# Altium PCB AUPSC.PcbDoc
Units mil, origin at the board's own origin, x right, y up, seen from the top; angles counter-clockwise.
Board outline 1204 x 1064 mil, 4 copper layers (Top Layer, GND, Layer 2, Bottom Layer), stack 63.159 mil thick; 38 components, 23 nets, 118 pads, 156 vias.
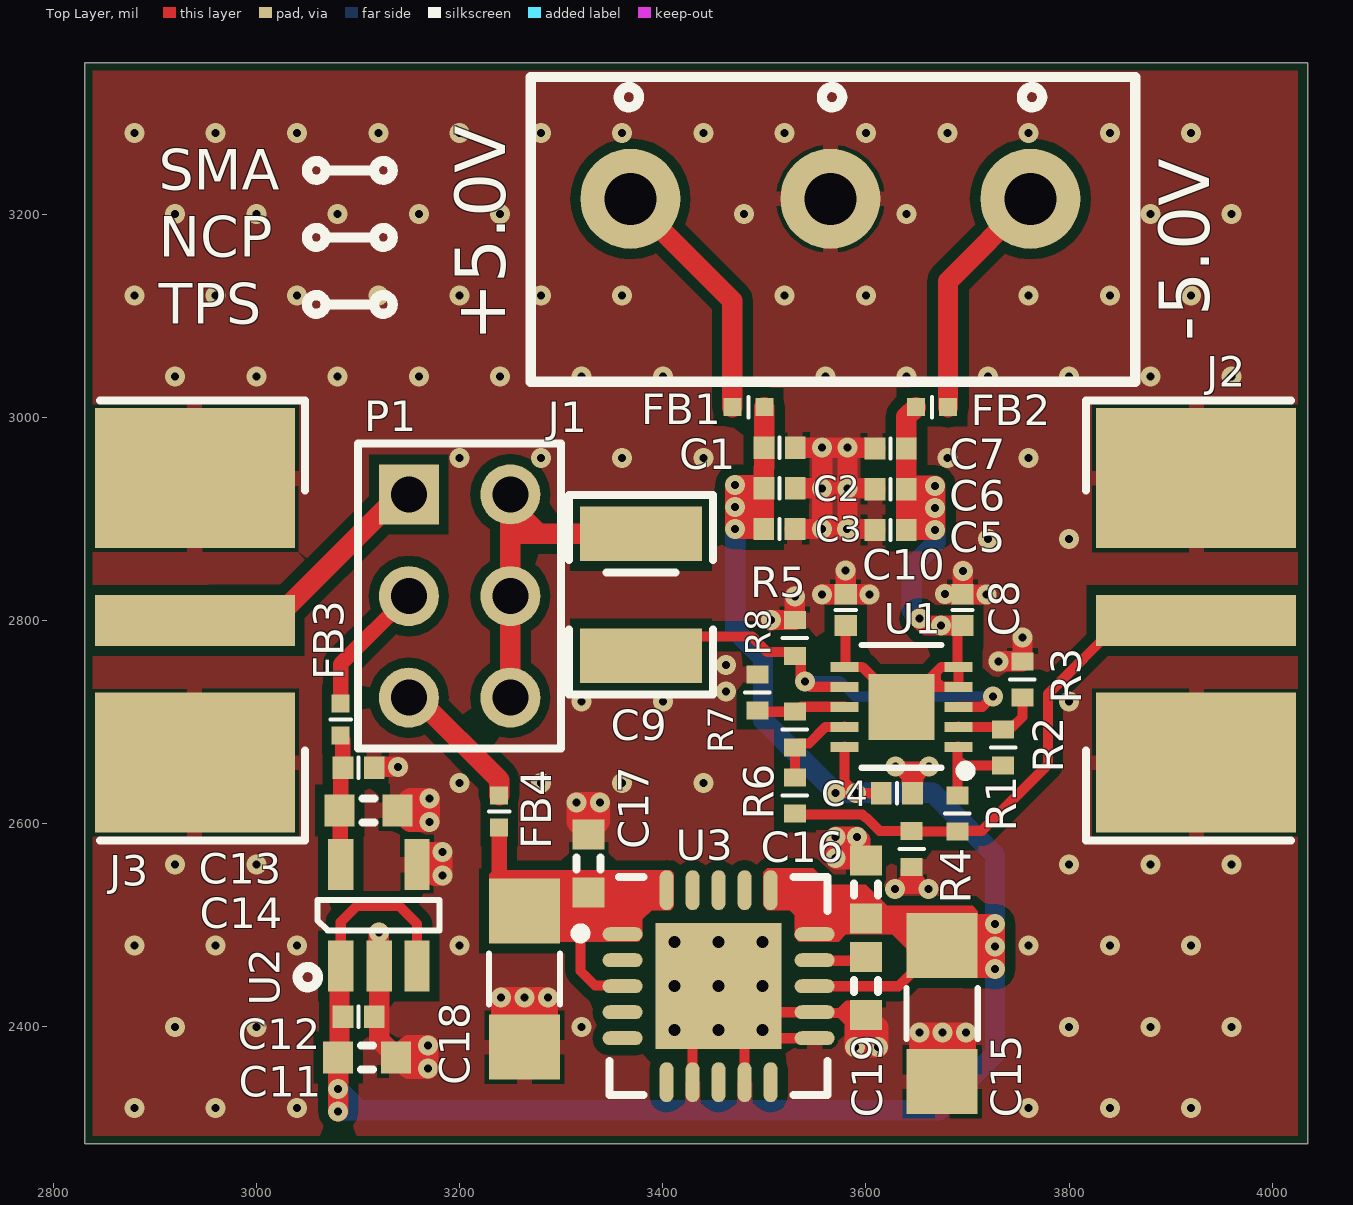
[diagram p0: Top Layer view]
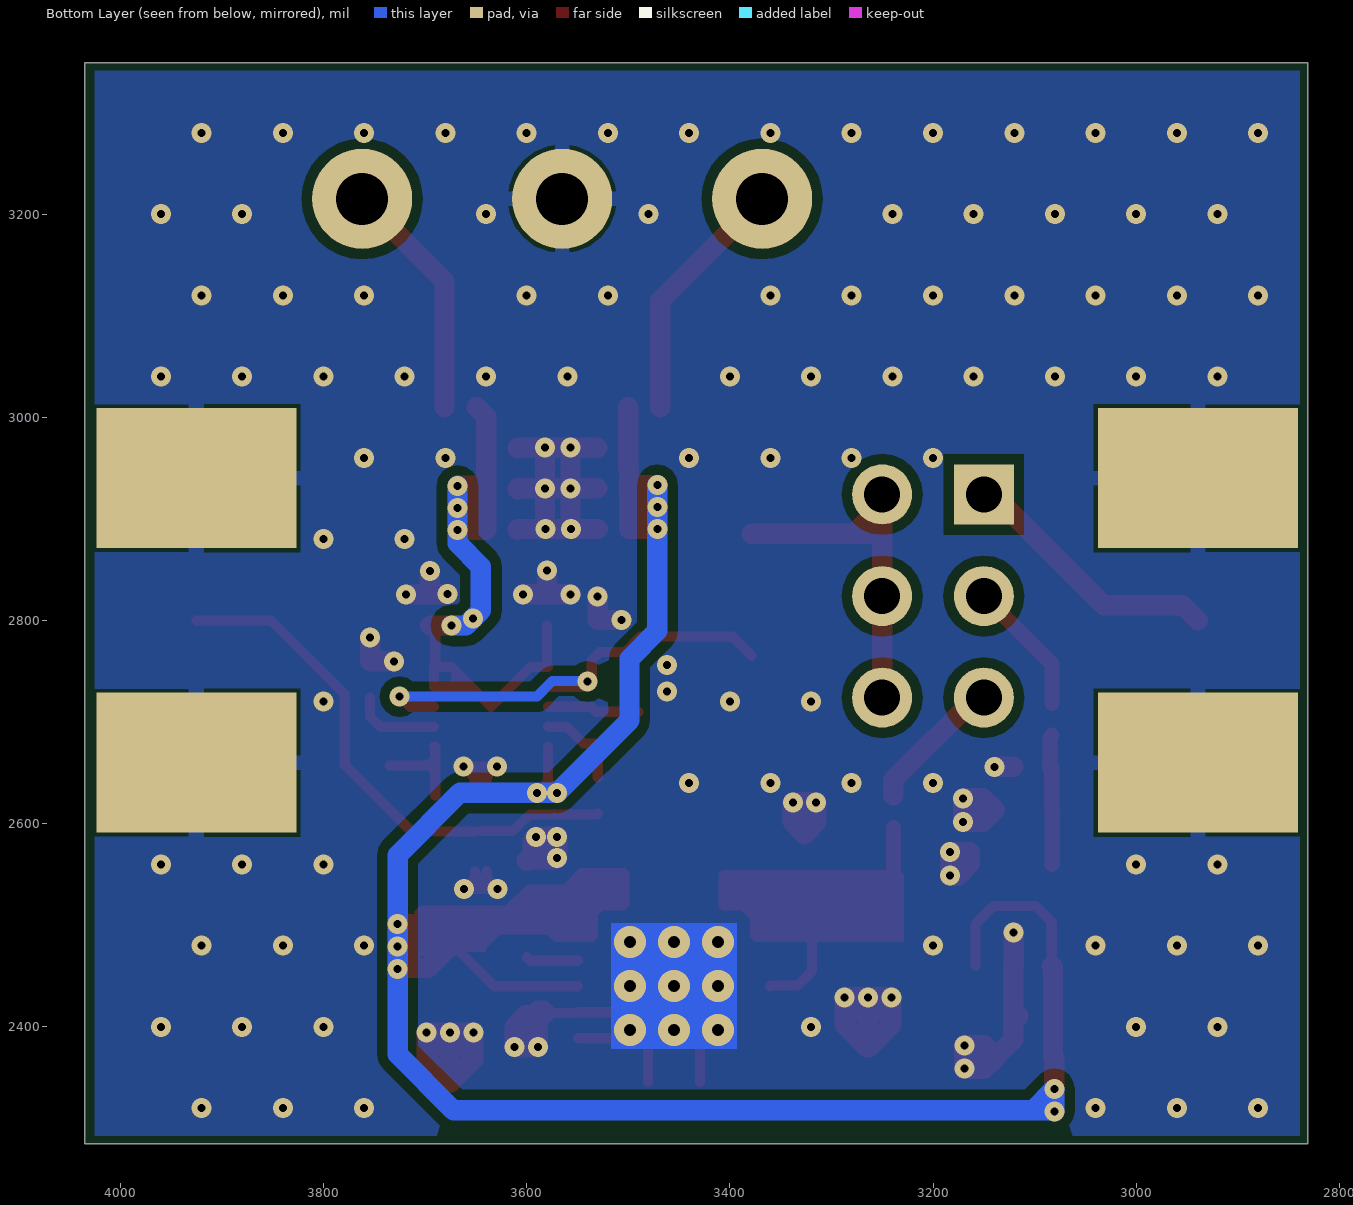
[diagram p1: Bottom Layer view, seen from below]
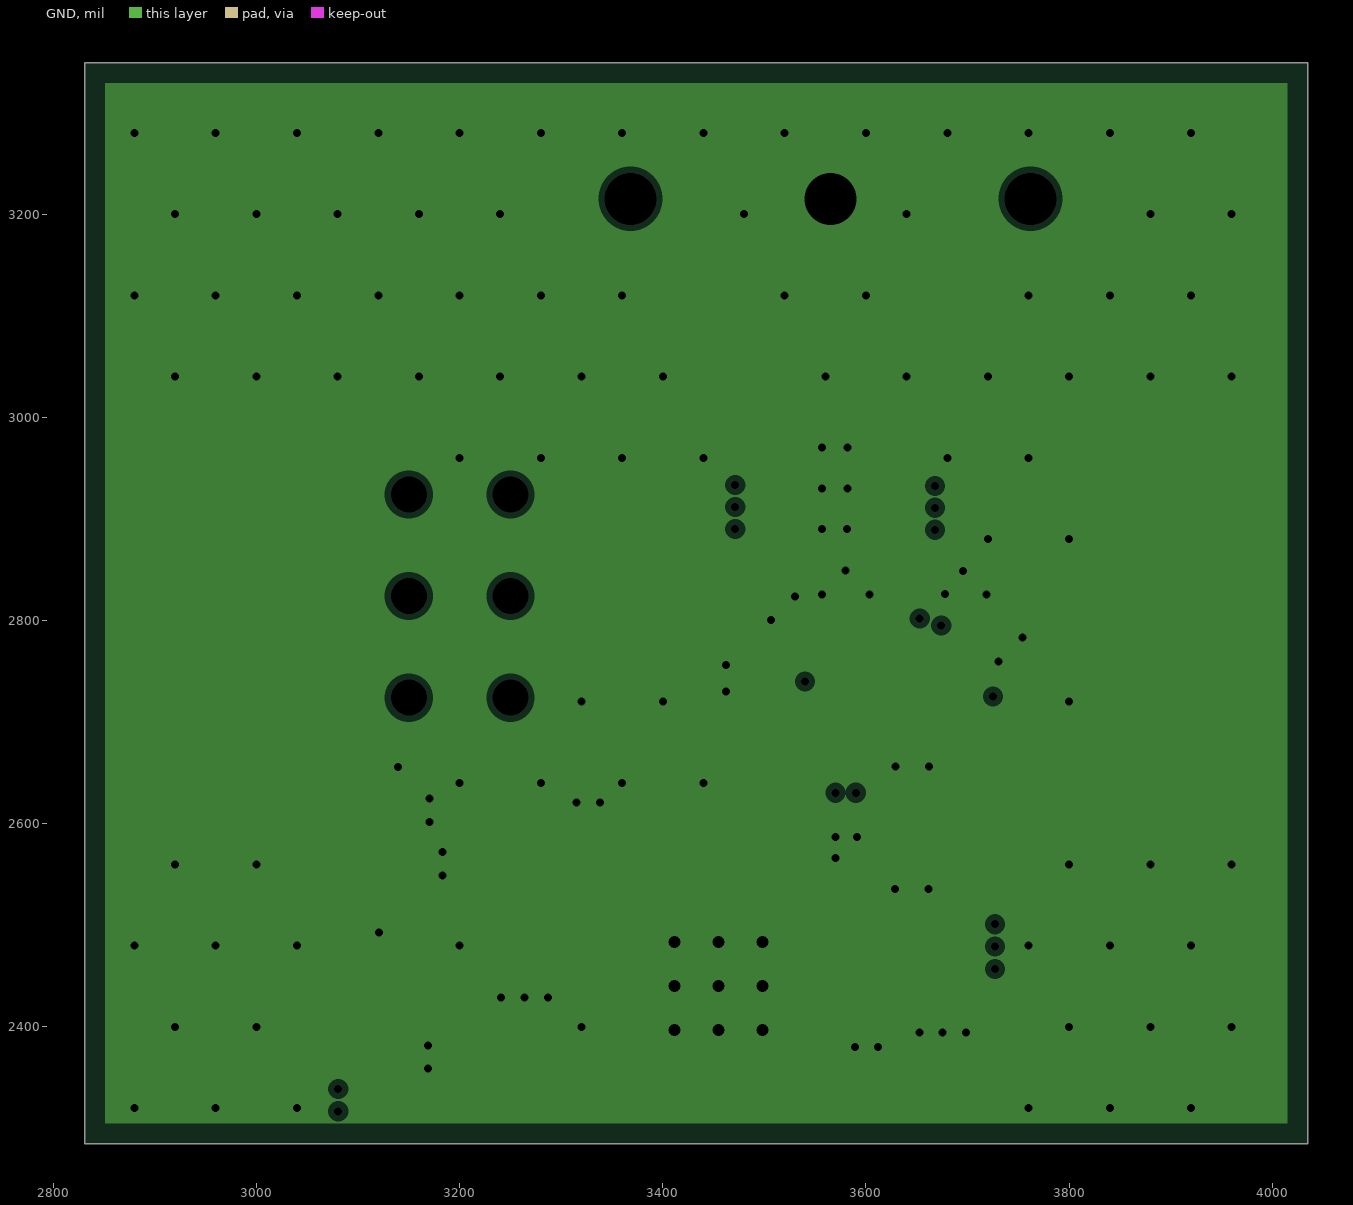
[diagram p2: GND, clearances drawn from the general rule]
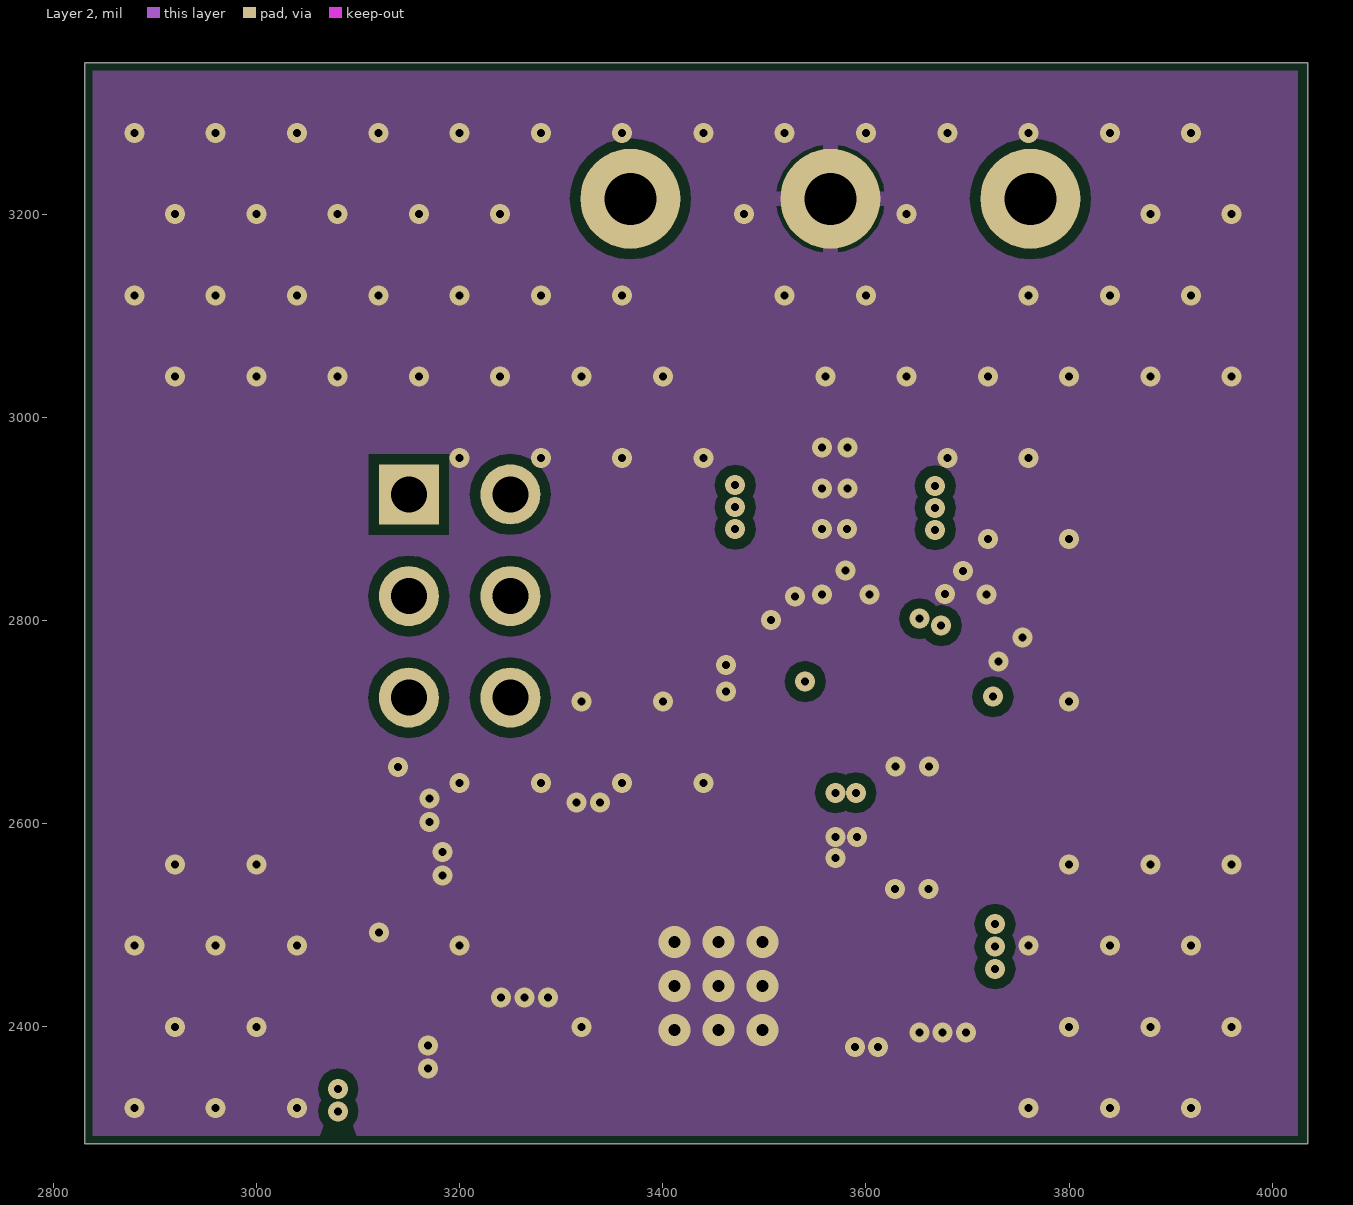
[diagram p3: Layer 2]
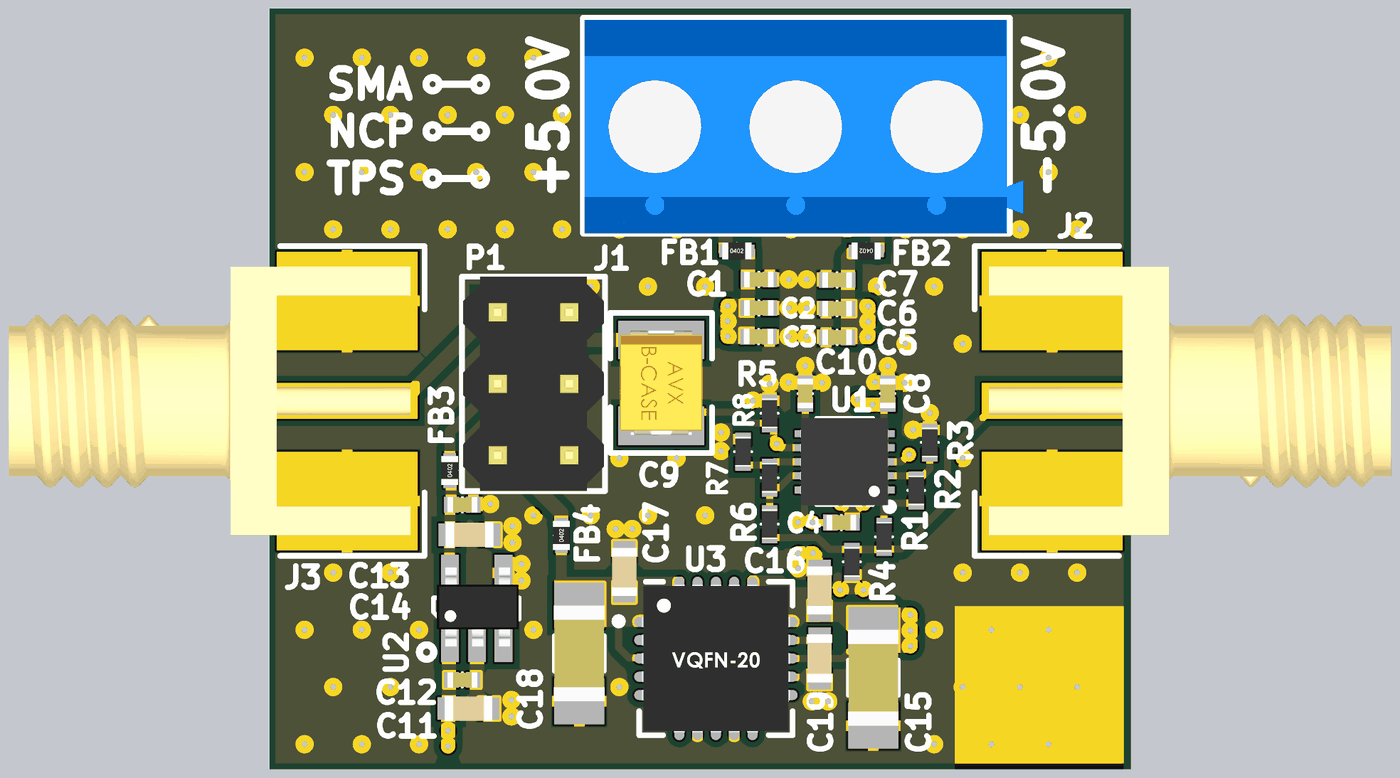
[diagram p4: 3D render of the assembled board from above, using the file's embedded part models]

## Layer stack, top to bottom
Top Solder: solder mask 0.3937, Solder Resist, Dk 3.5
Top Layer: signal copper 1.4173
Dielectric 2: prepreg 2.8, PP-006, Dk 4.1
GND: plane copper 1.378, net GND
Dielectric 1: dielectric 51.9685, FR-4, Dk 4.8
Layer 2: signal copper 1.378
Dielectric 3: prepreg 2.8, PP-006, Dk 4.1
Bottom Layer: signal copper 1.4173
Bottom Solder: solder mask 0.3937, Solder Resist, Dk 3.5

## Board outline
2831,2285 4035,2285 4035,3349 2831,3349

## Design rules (kind name [scope] priority, off if disabled: settings)
BoardOutlineClearance [All] p1: gap=7.87 ignorepadtopadclearanceinfootprint=FALSE
Clearance [All] p1: gap=5 ignorepadtopadclearanceinfootprint=FALSE except(7.87: Track-SMDPad; 10: Arc-Poly Track-Poly Track-Hole SMDPad-Poly THPad-Poly Via-Via Via-Poly Fill-Poly Poly-Poly Poly-Region Poly-Text Poly-Hole; 12.99: Track-THPad; 21.26: THPad-THPad)
ComponentClearance [All] p1: gap=4 collisioncheckmode=3 verticalgap=4 showdistances=TRUE
DiffPairsRouting [All] p1: maxlimit=4 minlimit=4 mostfreqgap=4 toplayer_minwidth=4 toplayer_maxwidth=71497.94 toplayer_prefwidth=4 midlayer1_minwidth=4 midlayer1_maxwidth=71497.94 midlayer1_prefwidth=4 bottomlayer_minwidth=4 bottomlayer_maxwidth=71497.94 bottomlayer_prefwidth=4 maxuncoupledlength=500
Height [All] p1: minheight=0 maxheight=71497.94 prefheight=500
HoleSize [All] p1: absolutevalues=TRUE maxlimit=248.03 minlimit=7.87 maxpercent=80.000 minpercent=20.000
HoleToHoleClearance [All] p1: gap=10 allowstackedmicrovias=FALSE
MinimumAnnularRing [All] p1: minimumring=5.12
MinimumSolderMaskSliver [All] p1: minsoldermaskwidth=0
PlaneClearance [All] p1: clearance=6
PlaneConnect [All] p1: pad.planeconnectstyle=Relief pad.reliefexpansion=11.81 pad.reliefentries=4 pad.reliefconductorwidth=15 pad.reliefairgap=4 via.planeconnectstyle=Direct via.reliefexpansion=11.81 via.reliefentries=4 via.reliefconductorwidth=5 via.reliefairgap=5
PolygonConnect [All] p1: thpad.connectstyle=Relief thpad.reliefconductorwidth=15 thpad.reliefentries=4 thpad.polygonreliefangle="90 Angle" thpad.airgapwidth=4 smdpad.connectstyle=Relief smdpad.reliefconductorwidth=15 smdpad.reliefentries=4 smdpad.polygonreliefangle="90 Angle" smdpad.airgapwidth=4 via.connectstyle=Direct via.reliefconductorwidth=5 via.reliefentries=4 via.polygonreliefangle="90 Angle" via.airgapwidth=5
RoutingVias [All] p1: holewidth=7.87 width=17.72 viastyle="Through Hole" minholewidth=7.87 minwidth=17.72 maxholewidth=248.03 maxwidth=257.87
SilkToSilkClearance [All] p1: silktosilkclearance=1
SilkToSolderMaskClearance [IsPad] p1: minsilkscreentomaskgap=2 clearancetoexposedcopper=TRUE
SolderMaskExpansion SolderMaskExpansion_VIA [IsVia] p1: expansion=-20 istentingtop=FALSE
SolderMaskExpansion [All] p2: expansion=2.95 istentingtop=FALSE
UnRoutedNet [All] p1: checkbadconnections=TRUE
Width [All] p1: maxlimit=200 minlimit=5 preferedwidth=6
19 further rules are at their usual default settings.

## Classes and differential pairs
component class U_TPS7A4701RGWR: C15 C16 C17 C18 C19 U3
component class U_NCP163ASN300T1G: C11 C12 C13 C14 U2
component class AUPSC: C1 C2 C3 C4 C5 C6 C7 C8 C9 C10 FB1 FB2 FB3 FB4 J1 J2 J3 P1 R1 R2 R3 R4 R5 R6 R7 R8 U1

## Components (designator, comment, footprint, x,y, rotation, side; value= is the part's Value field where it differs from the comment)
C1 "Ceramic X7R" C_0402_1005 3515,2970 r0 top value=1uF (schematic designator C9)
C2 "Ceramic X7R" C_0402_1005 3515,2930 r0 top value=100nF (schematic designator C10)
C3 "Ceramic C0G" C_0402_1005 3514.65,2890 r0 top value=1nF (schematic designator C11)
C4 "Ceramic X7R" C_0402_1005 3630.35,2630 r0 top value=100nF
C5 "Ceramic X7R" C_0402_1005 3624.35,2889 r0 top value=1uF (schematic designator C1)
C6 "Ceramic X7R" C_0402_1005 3624.35,2929.25 r0 top value=100nF (schematic designator C2)
C7 "Ceramic C0G" C_0402_1005 3624.35,2969.25 r0 top value=1nF (schematic designator C3)
C8 "Ceramic X7R" C_0402_1005 3695,2810.35 r90 top value=100nF (schematic designator C6)
C9 "Tantalum Capacitor" CT_1210_3225 3378.51,2825.32 r270 top value=100uF (schematic designator C5)
C10 "Ceramic X7R" C_0402_1005 3580,2810.35 r90 top value=100nF (schematic designator C7)
C11 "Ceramic X7R" C_0603_1608 3109.12,2369.89 r0 top value=1uF (schematic designator C1)
C12 "Ceramic X7R" C_0402_1005 3100.58,2409.89 r0 top value=100nF (schematic designator C2)
C13 "Ceramic X7R" C_0402_1005 3100.58,2654.89 r0 top value=100nF (schematic designator C3)
C14 "Ceramic X7R" C_0603_1608 3110.58,2612.89 r0 top value=1uF (schematic designator C4)
C15 "Ceramic X7R" C_1206_3216 3675,2413 r270 top value=10uF (schematic designator C17)
C16 "Ceramic X7R" C_0603_1608 3600,2535 r90 top value=100nF (schematic designator C18)
C17 "Ceramic X7R" C_0603_1608 3327,2561 r90 top value=100nF (schematic designator C19)
C18 "Ceramic X7R" C_1206_3216 3264,2447 r270 top value=10uF (schematic designator C20)
C19 "Ceramic X7R" C_0603_1608 3600,2440 r270 top value=1uF (schematic designator C21)
FB1 "Ferrite bead" FB_0402_1005 3484.25,3010 r0 top (schematic designator FB3)
FB2 "Ferrite bead" FB_0402_1005 3665,3010 r180 top (schematic designator FB1)
FB3 "Ferrite bead" FB_0402_1005 3083,2702.75 r90 top value=BLM15EG121SH1D (schematic designator FB4)
FB4 "Ferrite bead" FB_0402_1005 3239,2612 r90 top value=BLM15EG121SH1D (schematic designator FB2)
J1 "ARK3" J_ARK3 3565,3215 r0 top value=DG301-5.0-03P-12-18A(H) (schematic designator J3)
J2 "SMA EDGE" J_SMA_EDGE 4023.43,2800 r180 top
J3 "SMA EDGE" J_SMA_EDGE 2841,2800 r0 top (schematic designator J1)
P1 "Goldpin male" P_HEADER_2x3_2.54 3150,2924 r270 top value=DS1021-2*3SF1-1
R1 "Resistor" R_0402_1005 3690,2610 r270 top value=49.9R
R2 "Resistor" R_0402_1005 3735,2675 r270 top value=51k (schematic designator R3)
R3 "Resistor" R_0402_1005 3754,2742 r270 top value=49.9R (schematic designator R4)
R4 "Resistor" R_0402_1005 3645,2575 r90 top value=100k (schematic designator R5)
R5 "Resistor" R_0402_1005 3530,2782.72 r270 top value=500R (schematic designator R2)
R6 "Resistor" R_0402_1005 3530,2627.72 r270 top value=49.9R
R7 "Resistor" R_0402_1005 3530,2692.72 r270 top value=51k
R8 "Resistor" R_0402_1005 3493,2729 r270 top value=49.9R
U1 "ADA4807-2ACPZ" DFN10_3x3_EP 3635,2715 r90 top value=ADA4807-2ACPZ-R2
U2 "RF LDO" SOT23-5_SC74A_SOT753_M 3120.58,2509.89 r0 top value=NCP163ASN300T1G (schematic designator U1)
U3 "TPS7A4701RGWR" QFN20_5x5 3455,2440 r0 top (schematic designator U5)

## Footprints (in the part's own frame and the unit in brackets; to place one, negate y for a bottom-side part, rotate by r counter-clockwise, add the part's x,y. Pads: shape width x height; smd on the part's side, far side on the other; paste and mask are expansions set on the pad)
C_0402_1005 [mm]
  rect 0.52x0.56 smd: 1(-0.39,0) 2(0.39,0)
  silkscreen extent 0,-0.25 0,0.25, body extent -0.52,-0.27 0.53,0.28, height 0.55
C_0603_1608 [mm]
  rect 0.75x0.8 smd: 1(-0.725,0) 2(0.725,0)
  silkscreen extent -0.15,-0.3 0.15,0.3, body extent -0.85,-0.45 0.85,0.45, height 0.89
C_1206_3216 [mil]
  rect 64x70 smd: 1(-67,0) 2(67,0)
  silkscreen extent -25,-35 25,35, body extent -67,-35 67,35, height 39
CT_1210_3225 [mil]
  rect 54x120 smd: 1(-60,0) 2(60,0)
  silkscreen extent -98,-71 98,71, body extent -73,-58 73,58, height 80
DFN10_3x3_EP [mm]
  rect 0.25x0.7 smd: 1(-1,-1.425) 2(-0.5,-1.425) 3(0,-1.425) 4(0.5,-1.425) 5(1,-1.425) 6(1,1.425) 7(0.5,1.425) 8(0,1.425) 9(-0.5,1.425) 10(-1,1.425)
  rect 1.65x1.65 smd: EP1(0,0)
  silkscreen extent -1.73,-1.73 1.55,1, body extent -1.55,-1.56 1.55,1.56, height 0.8
FB_0402_1005 [mm]
  rect 0.45x0.45 smd: 1(-0.4,0) 2(0.4,0)
  silkscreen extent 0,-0.25 0,0.25, body extent -0.52,-0.3 0.52,0.3, height 0.34
J_ARK3 [mm]
  round 2.5 hole 1.3: 1(-5,0) 2(0,0) 3(5,0)
  silkscreen extent -7.49,-4.57 7.62,3.05, body extent -7.46,-4.6 8.14,3, height 10.05
J_SMA_EDGE [mm]
  rect 5x1.27 smd paste-5: 1(2.5,0)
  rect 5x3.5 smd paste-5: 2(2.5,3.556) 2(2.5,-3.556)
  rect 5x3.5 smd far side paste-5: 2(2.5,3.556) 2(2.5,-3.556)
  silkscreen extent 0.13,-5.5 5.25,5.5, body extent -9.53,-4.77 4.75,4.76, height 4.5
P_HEADER_2x3_2.54 [mm] "Connector; Header; 3x2 Position"
  rect 1.5x1.5 hole 0.9: 1(0,0)
  round 1.5 hole 0.9: 2(0,2.54) 3(2.54,0) 4(2.54,2.54) 5(5.08,0) 6(5.08,2.54)
  silkscreen extent -1.27,-1.27 6.35,3.81, body extent -1.27,-1.23 6.35,3.77, height 8.4
QFN20_5x5 [mm] "QFN, 20-Leads, Body 5,00x5,00mm, Pitch 0,65mm, Thermal Pad 3,15x3,15mm, IPC Medium Density"
  oval 1x0.35 smd: 1(-2.4,1.3) 2(-2.4,0.65) 3(-2.4,0) 4(-2.4,-0.65) 5(-2.4,-1.3) 11(2.4,-1.3) 12(2.4,-0.65) 13(2.4,0) 14(2.4,0.65) 15(2.4,1.3)
  oval 0.35x1 smd: 6(-1.3,-2.4) 7(-0.65,-2.4) 8(0,-2.4) 9(0.65,-2.4) 10(1.3,-2.4) 16(1.3,2.4) 17(0.65,2.4) 18(0,2.4) 19(-0.65,2.4) 20(-1.3,2.4)
  rect 3.15x3.15 smd paste-5: EP1(0,0)
  Bottom Layer region: -1.575,-1.575 1.575,-1.575 1.575,1.575 -1.575,1.575
  silkscreen extent -3.58,-2.72 2.73,2.73, body extent -2.62,-2.62 2.63,2.63, height 1.05
R_0402_1005 [mm] "Chip Resistor, 2-Leads, Body 1.00x0.50mm, IPC High Density"
  rect 0.45x0.55 smd: 1(-0.45,0) 2(0.45,0)
  silkscreen extent 0,-0.3 0,0.3, body extent -0.53,-0.28 0.53,0.28, height 0.37
SOT23-5_SC74A_SOT753_M [mil]
  rect 25x50 smd: 1(-37.5,-50) 2(0.5,-50) 3(37.5,-50) 4(37.5,50) 5(-37.5,50)
  silkscreen extent -80,-71 60,15, body extent -56,-53 59,57, height 57

## Part data
C1 C5: library part C_1uF_6.3V_X7R_0402_10, "Capacitor", dielectric=X7R, Manufacturer=Murata, Manufacturer Part Number=GRM155R70J105KA12D, Tolerance (%)=10, voltage=6.3V, HelpURL=https://www.mouser.com/ds/2/281/c02e-2905.pdf, Part Number=C_1uF_6.3V_X7R_0402_10, SCH_Footprint=0402, Supplier 1=TME, Supplier 2="RS Components", Supplier 3=Farnell, Supplier 4=Mouser, Supplier 5=Digi-Key, Supplier Part Number 4=81-GRM155R70J105KA2D
C2 C4 C6 C8 C10: library part C_100nF_16V_X7R_0402_10, "Capacitor", dielectric=X7R, Manufacturer=Murata, Manufacturer Part Number=GRM155R71C104KA88D, Tolerance (%)=10, voltage=16V, HelpURL=https://www.mouser.com/ds/2/281/c02e-2905.pdf, Part Number=C_100nF_16V_X7R_0402_10, SCH_Footprint=0402, Supplier 1=TME, Supplier 2="RS Components", Supplier 3=Farnell, Supplier 4=Mouser, Supplier 5=Digi-Key, Supplier Part Number 4=81-GRM155R71C104KA88
C3 C7: library part C_1nF_50V_C0G_0402_5, "Capacitor", dielectric=C0G, Manufacturer=Murata, Manufacturer Part Number=GRM1555C1H102JA01D, Tolerance (%)=5, voltage=50V, HelpURL=http://www.tme.eu/en/Document/e3e731e59cc68b1ab6d46b158bb05733/MURATA_GRM.pdf, Part Number=C_1nF_50V_C0G_0402_5, SCH_Footprint=0402, Supplier 1=TME, Supplier 2="RS Components", Supplier 3=Farnell, Supplier 4=Mouser, Supplier 5=Digi-Key, Supplier Part Number 1=GRM1555C1H102JA01D, Supplier Part Number 2=6242913, Supplier Part Number 3=2408520, Supplier Part Number 4=81-GRM1555C1H102JA1D, Supplier Part Number 5=490-3244-1-ND
C9: library part CT_100uF_10V_TA2O5_1210_20, "Capacitor", dielectric=TA2O5, Manufacturer=AVX, Manufacturer Part Number=TAJB107M010RNJ, Supplier Part Number 1=TAJB107M010R, Tolerance (%)=20, voltage=10V, HelpURL=https://datasheet.octopart.com/TAJB107M010RNJ-AVX-datasheet-12511273.pdf, Part Number=CT_100uF_10V_TA2O5_1210_20, SCH_Footprint=1210, Supplier 1=TME, Supplier 2="RS Components", Supplier 3=Farnell, Supplier 4=Mouser, Supplier 5=Digi-Key, Supplier 6=LCSC, Supplier Part Number 2=1360118, Supplier Part Number 3=1658150, Supplier Part Number 4=581-TAJB107M010R, Supplier Part Number 5=478-5801-1-ND
C11 C14: library part C_1UF_25V_X7R_0603_10, "Capacitor", dielectric=X7R, Manufacturer=Samsung, Manufacturer Part Number=CL10B105KA8NNNC, Part Number=C_1uF_25V_X7R_0603_10, Tolerance (%)=10, voltage=25V, HelpURL=http://www.tme.eu/pl/Document/4a42202b32dab16128fe107dd69598cc/samsung-chip-cap.pdf, SCH_Footprint=0603, Supplier 1=TME, Supplier 2="RS Components", Supplier 3=Farnell, Supplier 4=Mouser, Supplier 5=Digi-Key, Supplier Part Number 1=CL10B105KA8NNNC
C12 C13: library part C_100NF_50V_X7R_0402_10, "Capacitor", dielectric=X7R, Manufacturer=Murata, Manufacturer Part Number=GRM155R71H104KE14D, Part Number=C_100nF_50V_X7R_0402_10, Tolerance (%)=10, voltage=50V, HelpURL=http://docs-europe.electrocomponents.com/webdocs/145f/0900766b8145f9d2.pdf, SCH_Footprint=0402, Supplier 1=TME, Supplier 2="RS Components", Supplier 3=Farnell, Supplier 4=Mouser, Supplier 5=Digi-Key, Supplier Part Number 1=GRM155R71H104KE14D, Supplier Part Number 2=8847087, Supplier Part Number 3=2611912, Supplier Part Number 4=81-GRM155R71H104KE4D, Supplier Part Number 5=490-10700-1-ND
C15 C18: library part C_10uF_25V_X7R_1206_10, "Capacitor", dielectric=X7R, Manufacturer="Samsung Electro-Mechanics", Manufacturer Part Number=CL31B106KAHNNNE, Tolerance (%)=10, voltage=25V, HelpURL=http://www.tme.eu/pl/Document/4a42202b32dab16128fe107dd69598cc/samsung-chip-cap.pdf, Part Number=C_10uF_25V_X7R_1206_10, SCH_Footprint=1206, Supplier 1=TME, Supplier 2="RS Components", Supplier 3=Farnell, Supplier 4=Mouser, Supplier 5=Digi-Key, Supplier Part Number 1=CL31B106KAHNNNE
C16 C17: library part C_100nF_50V_X7R_0603_5, "Capacitor", dielectric=X7R, Manufacturer=Samsung, Manufacturer Part Number=CL10B104JB8NNNC, Tolerance (%)=5, voltage=50V, HelpURL=http://www.tme.eu/pl/Document/4a42202b32dab16128fe107dd69598cc/samsung-chip-cap.pdf, Part Number=C_100nF_50V_X7R_0603_5, SCH_Footprint=0603, Supplier 1=TME, Supplier 2="RS Components", Supplier 3=Farnell, Supplier 4=Mouser, Supplier 5=Digi-Key, Supplier Part Number 1=CL10B104JB8NNNC
C19: library part C_1uF_25V_X7R_0603_10, "Capacitor", dielectric=X7R, Manufacturer=Samsung, Manufacturer Part Number=CL10B105KA8NNNC, Tolerance (%)=10, voltage=25V, HelpURL=http://www.tme.eu/pl/Document/4a42202b32dab16128fe107dd69598cc/samsung-chip-cap.pdf, Part Number=C_1uF_25V_X7R_0603_10, SCH_Footprint=0603, Supplier 1=TME, Supplier 2="RS Components", Supplier 3=Farnell, Supplier 4=Mouser, Supplier 5=Digi-Key, Supplier Part Number 1=CL10B105KA8NNNC
FB1 FB2 FB3 FB4: library part FB_BLM15EG121SH1D, "Ferrite Bead", Current=1.5A, Manufacturer=Murata, Manufacturer Part Number=BLM15EG121SH1D, Resistance=95mR, HelpURL=http://datasheet.octopart.com/BLM15EG121SH1D-Murata-datasheet-37129980.pdf, Part Number=FB_BLM15EG121SH1D, SCH_Footprint=0402, Supplier 1=TME, Supplier 2="RS Components", Supplier 3=Farnell, Supplier 4=Mouser, Supplier 5=Digi-Key, Supplier 6=LCSC, Supplier Part Number 3=2871614, Supplier Part Number 4=81-BLM15EG121SH1D, Supplier Part Number 5=490-17344-1-ND
J1: library part J_TB-5.0-P-3P, "ARK Screw terminal, 3-Pin", Manufacturer="DEGSON ELECTRONICS", Manufacturer Part Number=DG301-5.0-03P-12-18A(H), Supplier Part Number 1=DG301-5.0-3/6B, HelpURL=https://datasheet.octopart.com/DG301-5.0-03P-12-18A%28H%29-Degson-datasheet-17801202.pdf, Part Number=J_TB-5.0-P-3P, SCH_Footprint=ARK3, Supplier 1=TME, Supplier 2="RS Components", Supplier 3=Farnell, Supplier 4=Mouser, Supplier 5=Digi-Key, Supplier 6=LCSC
J2 J3: library part J_SMA_EDGE_UNIVERSAL, "SMA connector", Part Number=J_SMA_EDGE_UNIVERSAL, SCH_Footprint="SMA EDGE", Supplier 1=TME, Supplier 2="RS Components", Supplier 3=Farnell, Supplier 4=Mouser, Supplier 5=Digi-Key, Supplier 6=LCSC
P1: library part P_HEADER_2x3_2.54, "Pin Header", Manufacturer=Connfly, Manufacturer Part Number=DS1021-2*3SF1-1, Supplier Part Number 1=ZL202-6G, HelpURL=https://www.tme.eu/Document/cc301e58a5da78cb543a94b5a5b7f06a/DS1021.pdf, Part Number=P_HEADER_2x3_2.54, SCH_Footprint="2x3 2.54mm", Supplier 1=TME, Supplier 2="RS Components", Supplier 3=Farnell, Supplier 4=Mouser, Supplier 5=Digi-Key, Supplier 6=LCSC
R1 R3 R6 R8: library part R_49.9R_0402_1, Manufacturer=Panasonic, Manufacturer Part Number=ERJ-2RKF49R9X, Power=100mW, Tolerance=1%, voltage=50V, HelpURL=https://datasheet.octopart.com/ERJ-2RKF49R9X-Panasonic-datasheet-13266541.pdf, Part Number=R_49.9R_0402_1, SCH_Footprint=0402, Supplier 1=TME, Supplier 2="RS Components", Supplier 3=Farnell, Supplier 4=Mouser, Supplier 5=Digi-Key, Supplier 6=LCSC, Supplier Part Number 2=812-6611, Supplier Part Number 3=2059109, Supplier Part Number 4=667-ERJ-2RKF49R9X, Supplier Part Number 5=P49.9LCT-ND
R2 R7: library part R_51k_0402_1, Manufacturer=Multicomp, Manufacturer Part Number=MCWR04X5102FTL, Power=62.5mW, Tolerance=1%, voltage=50V, HelpURL=http://www.farnell.com/datasheets/2563624.pdf?_ga=2.118585673.1757361746.1541820464-179212882.1536072512, Part Number=R_51k_0402_1, SCH_Footprint=0402, Supplier 1=TME, Supplier 2="RS Components", Supplier 3=Farnell, Supplier 4=Mouser, Supplier 5=Digi-Key, Supplier 6=LCSC, Supplier Part Number 3=2447195
R4: library part R_100k_0402_1, Manufacturer=Yageo, Manufacturer Part Number=RC0402FR-07100KL, Power=63mW, Supplier Part Number 1=RC0402FR-07100K, Tolerance=1%, voltage=50V, HelpURL=http://www.tme.eu/pl/Document/1a2bc76e2be68b3b1670068306778ce6/rc0402yageo.pdf, Part Number=R_100k_0402_1, SCH_Footprint=0402, Supplier 1=TME, Supplier 2="RS Components", Supplier 3=Farnell, Supplier 4=Mouser, Supplier 5=Digi-Key, Supplier 6=LCSC, Supplier Part Number 3=2131798, Supplier Part Number 4=603-RC0402FR-07100KL, Supplier Part Number 5=311-100KLRCT-ND
R5: library part R_500R_0402_0.1, Manufacturer=Vishay, Manufacturer Part Number=PNM0402E5000BST1, Power=50mW, Tolerance=0.1%, voltage=75V, HelpURL=https://www.vishay.com/docs/60057/pnm.pdf, Part Number=R_500R_0402_0.1, SCH_Footprint=0402, Supplier 1=TME, Supplier 2="RS Components", Supplier 3=Farnell, Supplier 4=Mouser, Supplier 5=Digi-Key, Supplier 6=LCSC, Supplier 7="Arrow Electronics", Supplier Part Number 4=71-PNM0402E5000BST1, Supplier Part Number 5=541-1905-1-ND, Supplier Part Number 7=PNM0402E5000BST1
U1: library part U_ADA4807-2ACPZ-R2, Manufacturer="Analog Devices", Manufacturer Part Number=ADA4807-2ACPZ-R2, HelpURL=https://datasheet.octopart.com/ADA4807-2ACPZ-R2-Analog-Devices-datasheet-41922906.pdf, Part Number=U_ADA4807-2ACPZ-R2, SCH_Footprint=DFN10, Supplier 1=TME, Supplier 2="RS Components", Supplier 3=Farnell, Supplier 4=Mouser, Supplier 5=Digi-Key, Supplier 6=LCSC, Supplier Part Number 2=8930435, Supplier Part Number 3=2490570, Supplier Part Number 4=584-ADA4807-2ACPZ-R2, Supplier Part Number 5=ADA4807-2ACPZ-R2CT-ND
U2: library part VL_NCP163ASN300T1G, "typical SOT23 configuration", Current=250mA, Manufacturer="ON Semiconductor", Manufacturer Part Number=NCP163ASN300T1G, voltage=3V, HelpURL=https://www.onsemi.com/pub/Collateral/NCP163-D.PDF, Part Number=VL_NCP163ASN300T1G, SCH_Footprint=SOT23-5, Supplier 1=TME, Supplier 2="RS Components", Supplier 3=Farnell, Supplier 4=Mouser, Supplier 5=Digi-Key, Supplier Part Number 3=3131475, Supplier Part Number 4=863-NCP163ASN300T1G, Supplier Part Number 5=NCP163ASN300T1GOSCT-ND
U3: library part VL_TPS7A4701RGWR_ADJ_1A, "RF LDO Voltage Regulator", Current=1A, Manufacturer="Texas Instruments", voltage=ADJ, HelpURL=http://www.ti.com/lit/ds/symlink/tps7a47.pdf, Manufacturer Part Number=TPS7A4701RGWR, Part Number=VL_TPS7A4701RGWR_ADJ_1A, SCH_Footprint=VQFN20, Supplier 1=TME, Supplier 2="RS Components", Supplier 3=Farnell, Supplier 4=Mouser, Supplier 5=Digi-Key, Supplier Part Number 3=2542798, Supplier Part Number 4=595-TPS7A4701RGWR, Supplier Part Number 5=296-37224-1-ND

## Via types
v1: diameter 19.68, hole 7.87, Top Layer to Bottom Layer, 147 vias
v2: diameter 31.5, hole 11.81, Top Layer to Bottom Layer, 9 vias

## Nets (pads, with @x,y where several pads share a name; then routed paths per layer and width w, separated by ;. In a path a pad name is that pad's centre, name@x,y a point inside that pad or via, vN(x,y) a via of type N, cw(c..) or ccw(c..) an arc to the next point about the centre after c; other vN are vias at no path point)
+5.0V: C1.1 C2.1 C3.1 C4.1 C11.1 C12.1 C15.1 C16.1 FB1.2 U1.10 U2.1 U2.3 U3.13 U3.15 U3.16 | length 2746.1
  Top Layer w10: U2.1 3083.08,2503.18 3098.78,2518.89 3140.58,2518.89 3158.08,2501.39 U2.3 ; U3.16 3535.51,2534.49 3550,2520 3550,2505.85 ; U3.13 3632,2440 C15.1@3672,2480 ; U3.15 3550,2491.69 3550,2505.85 ; U1.10 3578.9,2641.1 ; v1@3590,2630 C4.1 ; v1(3590,2630.34) v1@3589.66,2630.34 ; C15.1 C15.1@3672,2480 ; 3550,2505.85 3550.61,2506.46 C16.1 3645.54,2506.46 C15.1@3672,2480 ; 3578.9,2641.1 v1@3589.66,2630.34 ; 3578.9,2641.1 3570,2632.2 v1(3570,2630.34) v1@3589.66,2630.34
  Top Layer w20: v1(3080.58,2316.89) v1(3080.58,2338.89) C11.1 3081.83,2371.14 3081.83,2458.64 U2.1 ; C2.1@3499.29,2933.19 3499.29,2950.04 3500,2950.75 FB1.2 ; C15.1@3672,2480 3673,2479 C15.1@3676,2479 ; 3483.89,2933.19 3496.45,2933.19 3498.62,2931.02 3499.41,2931.02 3499.65,2930.79 C2.1 3499.41,2929.76 3499.41,2928.5 3499.29,2928.39 C3.1 3485.31,2890 ; 3483.89,2933.19 v1(3471.32,2933.19) v1(3471.32,2911.6) v1(3471.32,2890) 3485.31,2890 ; 3483.89,2933.19 3485.31,2931.77 3485.31,2890 ; C15.1@3676,2479 3714,2479 ; C15.1@3676,2479 3697,2458 3714,2458 ; C15.1@3676,2479 C15.1 3696,2501 3711.5,2501 ; 3711.5,2501 v1(3727,2501) v1(3727,2479) ; 3711.5,2501 3714,2498.5 3714,2479 ; 3714,2458 3714,2479 ; 3714,2458 3726,2458 v1(3727,2457) v1(3727,2479) ; 3714,2479 v1(3727,2479)
  Bottom Layer w20: v1(3080.58,2316.89) v1@3080.58,2318 ; v1(3471.32,2933.19) v1(3471.32,2911.6) v1(3471.32,2890) 3471.32,2789.68 3498.69,2762.31 3498.69,2701.64 v1(3570,2630.34) ; v1@3575.66,2630.34 v1(3590,2630.34) 3665.66,2630.34 3727,2569 v1(3727,2501) v1(3727,2479) v1(3727,2457) 3727,2373 3672,2318 3101.47,2318 ; v1@3080.58,2318 3101.47,2318 ; v1@3080.58,2318 v1(3080.58,2338.89) 3101.47,2318
-5.0V: C5.2 C6.2 C7.2 C8.1 C10.1 FB2.2 U1.4 U1.5 U1.6 U1.EP1 | length 830.7
  Top Layer w10: C10.1 3580,2754.45 3579.92,2754.37 U1.6 3578.98,2754.29 3596.2,2754.29 3607.52,2742.97 3607.52,2742.48 U1.EP1 U1.EP1@3654.68,2734.68 ; 3669.58,2748.79 3668.98,2748.19 3668.98,2739.99 ; C8.1 3690,2790 3690,2754.45 3690.08,2754.37 U1.5 ; U1.EP1@3654.68,2734.68 3672.89,2734.68 ; U1.EP1@3654.68,2734.68 U1.EP1@3664.49,2744.49 ; U1.EP1@3664.49,2744.49 3668.98,2739.99 ; U1.EP1@3664.49,2744.49 3674.29,2754.29 3691.02,2754.29 U1.5 ; 3668.98,2739.99 3672.89,2736.08 3672.89,2734.68 ; 3672.89,2734.68 U1.4 U1.5
  Top Layer w20: C5.2 C6.2 ; FB2.2 3639.71,3000.46 C7.2 C6.2@3639.71,2930.04 ; v1(3652.86,2801.86) 3659.72,2795 v1(3674,2795) C8.1 ; C6.2 C6.2@3639.71,2930.04 ; C6.2 3639.94,2929.02 3639.94,2927.76 3640.06,2927.64 3640.06,2889.25 3654.05,2889.25 ; C6.2@3639.71,2930.04 3639.94,2930.28 3640.73,2930.28 3642.9,2932.44 3655.47,2932.44 ; 3654.05,2889.25 3654.05,2931.02 3655.47,2932.44 ; 3654.05,2889.25 v1(3668.03,2889.25) v1(3668.03,2910.85) v1(3668.03,2932.44) 3655.47,2932.44
  Bottom Layer w20: v1(3668.03,2932.44) v1(3668.03,2910.85) 3668.03,2876.03 3645,2853 3645,2809.72 3659.72,2795 v1(3674,2795)
GND: C1.2 C2.2 C3.2 C4.2 C5.1 C6.1 C7.1 C8.2 C10.2 C11.2 C12.2 C13.2 C14.2 C15.2 C16.2 C17.2 C18.2 C19.2 J1.2 J2.2 J3.2 R3.1 R4.1 R5.1 R8.1 U2.2 U2.4 U3.7 U3.9 U3.11 U3.12 U3.EP1 | length 2728.2
  Top Layer w10: C11.2@3135.44,2367.66 C11.2 ; C14.2@3136.89,2610.66 C14.2 ; C17.2 C17.2@3329.23,2587.31 ; U3.7 3429.41,2414.41 v2(3455,2440) U3.EP1@3480.59,2414.41 ; U3.9 U3.EP1@3480.59,2414.41 ; U3.11 3506.18,2388.82 v2(3498.31,2396.69) U3.EP1@3480.59,2414.41 ; v1(3570,2566) v1@3571.23,2564.77 ; C19.2@3588.98,2399.46 3574.75,2413.69 ; v1(3590.97,2586.97) 3590.97,2572.57 3594.25,2569.29 3598.77,2564.77 C16.2 ; C19.2 C19.2@3597.77,2413.69 ; R4.1@3639.17,2553.43 3639.17,2546.3 ; C4.2@3639.82,2638.65 3639.82,2645.78 ; R4.1@3650.83,2553.43 3650.83,2546.3 ; C4.2@3651.47,2638.65 3651.47,2645.78 ; U3.EP1@3480.59,2414.41 U3.12 3550.21,2413.69 3574.75,2413.69 ; 3574.75,2413.69 3582.12,2421.05 3590.4,2421.05 C19.2@3597.77,2413.69 ; 3574.75,2413.69 C19.2@3597.77,2413.69 ; v1@3630.42,2537.54 3639.17,2546.3 ; v1@3630.42,2537.54 v1(3628.57,2535.69) v1(3661.43,2535.69) v1@3656.13,2541 ; v1@3630.42,2537.54 3652.68,2537.54 v1@3656.13,2541 ; v1@3634.51,2651.08 3637.96,2654.53 v1@3660.22,2654.53 ; v1@3634.51,2651.08 3639.82,2645.78 ; v1@3634.51,2651.08 v1(3629.21,2656.38) v1(3662.08,2656.38) v1@3660.22,2654.53 ; 3639.17,2546.3 3650.83,2546.3 ; 3639.82,2645.78 3651.47,2645.78 ; 3650.83,2546.3 v1@3656.13,2541 ; 3651.47,2645.78 v1@3660.22,2654.53
  Top Layer w20: C12.2 3115.94,2410.65 3116.17,2410.89 C12.2@3121.08,2410.89 ; v1(3120.58,2492.89) 3120.58,2460.39 U2.2 C12.2@3121.08,2410.89 ; C13.2@3121.08,2655.89 v1(3139.58,2655.89) ; C11.2 C11.2@3137.67,2370.87 ; C14.2 3139.12,2613.87 3143.89,2618.63 3144.87,2618.63 C14.2@3151.12,2624.89 ; C11.2@3142.43,2365.12 3143.42,2365.12 3149.67,2358.87 v1(3169.12,2358.87) v1@3169.12,2362.43 ; C14.2@3143.89,2608.12 3144.87,2608.12 3151.12,2601.87 v1(3170.58,2601.87) v1@3170.58,2605.43 ; C17.2 3326.02,2589.54 3321.25,2594.31 3321.25,2595.29 C17.2@3315,2601.54 ; C17.2@3331.76,2594.31 3331.76,2595.29 3338.02,2601.54 v1(3338.02,2621) v1@3334.46,2621 ; v1@3506.71,2800.43 R5.1 v1@3530,2823.72 ; C3.2 v1(3556.52,2890) ; C2.2 v1(3556.87,2930) ; C1.2 v1(3556.87,2970) ; v1(3556.65,2825.75) C10.2 ; v1@3571.23,2564.77 C16.2@3597.79,2564.77 ; v1@3580,2849 C10.2 ; v1(3590.97,2586.97) 3594.25,2583.69 3594.25,2569.29 3594.25,2568.31 C16.2@3597.79,2564.77 ; C19.2@3595.24,2406.69 3595.24,2405.71 3588.98,2399.46 v1(3588.98,2380) v1@3592.54,2380 ; C16.2@3598.77,2564.77 C16.2@3597.79,2564.77 ; C19.2 3600.98,2411.46 3605.75,2406.69 3605.75,2405.71 C19.2@3612,2399.46 ; C16.2 3599.02,2563.54 C16.2@3597.79,2564.77 ; v1(3603.35,2825.67) C10.2 ; C5.1 3609,2889.76 3608.76,2890 v1(3581.52,2890) ; C6.1 3609,2929.76 3608.76,2930 v1(3581.87,2930) ; C7.1 3609,2969.76 3608.76,2970 v1(3581.87,2970) ; v1(3677.7,2826.22) 3677.97,2825.94 3694.76,2825.94 C8.2 ; v1@3695.24,2848.76 3695.24,2825.47 v1@3718.53,2825.47 ; v1(3730.65,2759.68) R3.1 v1@3754,2783.01 ; C12.2@3121.08,2410.89 3121.08,2387.46 C11.2@3137.67,2370.87 ; C11.2@3137.67,2370.87 3142.43,2375.63 3143.42,2375.63 C11.2@3149.67,2381.89 ; C11.2@3149.67,2381.89 v1@3169.12,2362.43 ; C11.2@3149.67,2381.89 v1(3169.12,2381.89) v1@3169.12,2362.43 ; C14.2@3151.12,2624.89 v1@3170.58,2605.43 ; C14.2@3151.12,2624.89 v1(3170.58,2624.89) v1@3170.58,2605.43 ; U2.4@3163.67,2571.89 3163.67,2560.59 3175.38,2548.87 v1(3183.12,2548.87) v1@3183.12,2552.43 ; U2.4@3163.67,2571.89 v1@3183.12,2552.43 ; U2.4@3163.67,2571.89 v1(3183.12,2571.89) v1@3183.12,2552.43 ; 3241,2415.5 v1(3241,2429) v1(3264,2429) ; 3241,2415.5 3241,2402 C18.2@3263,2380 ; 3241,2415.5 3264,2415.5 ; C18.2@3263,2380 C18.2 3265,2380 3287,2402 3287,2415.5 ; C18.2@3263,2380 3264,2381 3264,2415.5 ; 3264,2415.5 v1(3264,2429) ; 3264,2415.5 3287,2415.5 ; v1(3264,2429) v1(3287,2429) 3287,2415.5 ; C17.2@3315,2601.54 v1(3315,2621) v1@3334.46,2621 ; C17.2@3315,2601.54 v1@3334.46,2621 ; v1(3556.52,2890) 3556.87,2890.35 v1(3556.87,2930) ; v1(3556.52,2890) v1(3581.52,2890) ; v1(3556.87,2930) v1(3556.87,2970) ; v1(3556.87,2930) v1(3581.87,2930) ; v1(3556.87,2970) v1(3581.87,2970) ; v1(3581.52,2890) 3581.87,2890.35 v1(3581.87,2930) ; v1(3581.87,2930) v1(3581.87,2970) ; v1@3592.54,2380 C19.2@3612,2399.46 ; v1@3592.54,2380 v1(3612,2380) C19.2@3612,2399.46 ; 3652.5,2381 3675.5,2381 ; 3652.5,2381 3652.5,2367.5 C15.2@3674.5,2345.5 ; 3652.5,2381 v1(3652.5,2394.5) v1(3675.5,2394.5) ; C15.2@3674.5,2345.5 3675.5,2346.5 3675.5,2381 ; C15.2@3674.5,2345.5 3676.5,2345.5 3698.5,2367.5 3698.5,2381 ; 3675.5,2381 3698.5,2381 ; 3675.5,2381 v1(3675.5,2394.5) ; v1(3675.5,2394.5) v1(3698.5,2394.5) 3698.5,2381 ; v1(3570,2566) v1(3590.97,2586.97) v1(3570,2587) v1(3570,2566)
  other v1: 2880,2320 2960,2320 3040,2320 3760,2320 3840,2320 3920,2320 2920,2400 3000,2400 3320,2400 3800,2400 3880,2400 3960,2400 2880,2480 2960,2480 3040,2480 3200,2480 3760,2480 3840,2480 3920,2480 2920,2560 3000,2560 3800,2560 3880,2560 3960,2560 3200,2640 3280,2640 3360,2640 3440,2640 3320,2720 3400,2720 3800,2720 3462,2730 3462,2756 3753.96,2783.07 3506.65,2800.47 3530.04,2823.78 3718.59,2825.43 3580.04,2849.06 3695.28,2848.82 3720,2880 3800,2880 3200,2960 3280,2960 3360,2960 3440,2960 3680,2960 3760,2960 2920,3040 3000,3040 3080,3040 3160,3040 3240,3040 3320,3040 3400,3040 3560,3040 3640,3040 3720,3040 3800,3040 3880,3040 3960,3040 2880,3120 2960,3120 3040,3120 3120,3120 3200,3120 3280,3120 3360,3120 3520,3120 3600,3120 3760,3120 3840,3120 3920,3120 2920,3200 3000,3200 3080,3200 3160,3200 3240,3200 3480,3200 3640,3200 3880,3200 3960,3200 2880,3280 2960,3280 3040,3280 3120,3280 3200,3280 3280,3280 3360,3280 3440,3280 3520,3280 3600,3280 3680,3280 3760,3280 3840,3280 3920,3280
  other v2: 3411.69,2396.69 3455,2396.69 3411.69,2440 3498.31,2440 3411.69,2483.31 3455,2483.31 3498.31,2483.31
IN: C9.2 R5.2 U1.3 U1.7 | length 468.4
  Top Layer w10: C9.2 3397.5,2784.31 3487.69,2784.31 3503.14,2768.86 3528.11,2768.86 3535.83,2761.14 3535.83,2744.17 v1(3540.1,2739.88) 3545.3,2734.68 U1.7 ; U1.3 3714.67,2715 3724.67,2725 v1(3725,2725)
  Bottom Layer w10: v1(3540.1,2739.88) 3540.71,2740.5 3574.5,2740.5 3590,2725 v1(3725,2725)
IN1: J3.1 P1.1 | length 261.9
  Top Layer w20: J3.1 2954.43,2815 3032,2815 3132,2915 3141,2915 P1.1
IN2: FB3.2 P1.3 | length 133.3
  Top Layer w15: FB3.2 3083,2757 P1.3
IN3: FB4.2 P1.5 | length 139.8
  Top Layer w20: P1.5 3149,2723 3159,2723 3239,2643 FB4.2
NetC9_1: C9.1 P1.2 P1.4 P1.6 | length 368.8
  Top Layer w20: P1.6 P1.4 3250,2882 ; P1.2 P1.2@3250,2913.43 ; C9.1 3276,2885.32 ; 3250,2882 P1.2@3250,2913.43 ; 3250,2882 3253.32,2885.32 3276,2885.32 ; P1.2@3250,2913.43 3276,2887.43 3276,2885.32
NetC13_1: C13.1 C14.1 FB3.1 U2.5 | length 128.7
  Top Layer w15: C14.1 3082.56,2612.36 3082.56,2560.41 U2.5 ; FB3.1 3084.36,2685.64 3084.36,2682.93 3084.95,2682.34 3084.95,2658.41 3085.23,2658.13 C13.1 ; C14.1@3083.08,2612.89 C13.1@3083.08,2655.12
NetC17_1: C17.1 C18.1 FB4.1 U3.1 U3.3 U3.20 | length 413.3
  Top Layer w10: C18.1@3239,2539 C18.1 3284.49,2534.49 3327,2534.49 3359,2534.49 ; C17.1 3319,2524.46 3319,2455 3333.28,2440.72 3359.79,2440.72 U3.3 ; U3.1 3360.51,2532.98 3359,2534.49 ; U3.20 3359,2534.49
  Top Layer w15: C18.1@3239,2539 FB4.1
NetC19_1: C19.1 U3.14 | length 52.2
  Top Layer w10: U3.14 3550.08,2465 3596.46,2465 C19.1
NetFB1_1: FB1.1 J1.1 | length 246.6
  Top Layer w20: J1.1 3468.5,3114.65 FB1.1
NetFB2_1: FB2.1 J1.3 | length 238.6
  Top Layer w20: FB2.1 3680.75,3133.9 J1.3
NetR1_1: R1.1 R2.2 U1.1 | length 105
  Top Layer w10: R1.1 3690,2651.63 ; U1.1 3690.08,2675.63 3690,2675.55 3690,2663.59 ; R2.2 3695.65,2657.28 ; 3690,2651.63 3695.65,2657.28 ; 3690,2651.63 3690,2663.59 ; 3690,2663.59 3695.65,2657.94 3695.65,2657.28
NetR2_1: R2.1 R3.2 U1.2 | length 86.3
  Top Layer w10: U1.2 3691.18,2695.24 3744.24,2695.24 3754,2705 R3.2
NetR6_1: R6.1 R7.2 U1.9 | length 86.9
  Top Layer w10: R6.1 R7.2 3533.86,2678.86 3543.86,2678.86 3560.24,2695.24 3578.82,2695.24 U1.9
NetR7_1: R7.1 R8.2 U1.8 | length 91.3
  Top Layer w10: R8.2@3490,2710 3490.22,2710.22 R7.1@3529.78,2710.22 ; R7.1 R7.1@3529.78,2710.22 ; U1.8 3536.54,2715 3531.75,2710.22 R7.1@3529.78,2710.22
NetU3_4: U3.4
NetU3_5: U3.5
NetU3_6: U3.6
NetU3_8: U3.8
NetU3_10: U3.10
OUT: J2.1 R1.2 R4.2 R6.2 | length 523.9
  Top Layer w10: R6.2 3531,2609 3596.53,2609 3599.43,2606.1 3600.12,2606.1 3613.51,2592.72 R4.2 ; R4.2@3650,2592.28 R1.2 3690.72,2593 3714,2593 3779,2658 3779,2727.43 3851.57,2800 J2.1
pads on no net: U3.2 U3.17 U3.18 U3.19

## Polygon pours and split planes (outlines as drawn)
GND on Bottom Layer "GND_L04_P002" (solid, remove dead copper, pour order 2): 2839,3349 4025,3349 4025,2285 2839,2285
GND on Top Layer "GND_L01_P000" (solid, remove dead copper, pour order 0): 2839,3349 4025,3349 4025,2285 2839,2285
GND on Layer 2 "GND_L03_P003" (solid, remove dead copper, pour order 3): 2839,3349 4025,3349 4025,2285 2839,2285
GND on GND (split plane): 4014.9,2305.1 2851.1,2305.1 2851.1,3328.9 4014.9,3328.9

## Other copper
Top Layer:
  region: 3437,2576
  region net NetC17_1: 3408,2554 3411,2551 3411,2518 3408,2515 3389,2515 3380,2506 3380,2488 3376,2484 3229,2484 3229,2550 3233,2554
  region net +5.0V: 3503,2556 3499,2552 3499,2519 3503,2515 3525,2515 3530,2510 3530,2488 3534,2484 3573,2484 3580,2491 3626,2491 3640,2477 3640,2474 3706,2474 3710,2478 3710,2514 3705,2519 3621,2519 3600,2540 3564,2540 3548,2556

## Silkscreen, mask and mechanical layers (free items; w line width, h text height)
Top Overlay:
  circle w10: c3059,3111 r9.22
  circle w10: c3059,3177 r9.22
  circle w10: c3059,3243 r9.22
  circle w10: c3125,3111 r9.22
  circle w10: c3125,3177 r9.22
  circle w10: c3125,3243 r9.22
  lines w10: 3068.22,3111 3115.56,3111 ; 3068.22,3177 3115.56,3177 ; 3068.22,3243 3115.56,3243
  text "SMA" at 2904,3224 h40
  text "NCP" at 2904,3158 h40
  text "TPS" at 2904,3092 h40
  text "+5.0V" at 3245,3075 h50 r90
  text "-5.0V" at 3938,3075 h50 r90
Top Solder:
  rectangle: 3789,2285 4025,2513
Bottom Solder:
  rectangle: 3789,2285 4025,2513
Mechanical 1:
  the board outline again, w10